# EAGLE board Qwiic_Quad_Relay-Panel (EAGLE 9.0.1), part 1 of 2
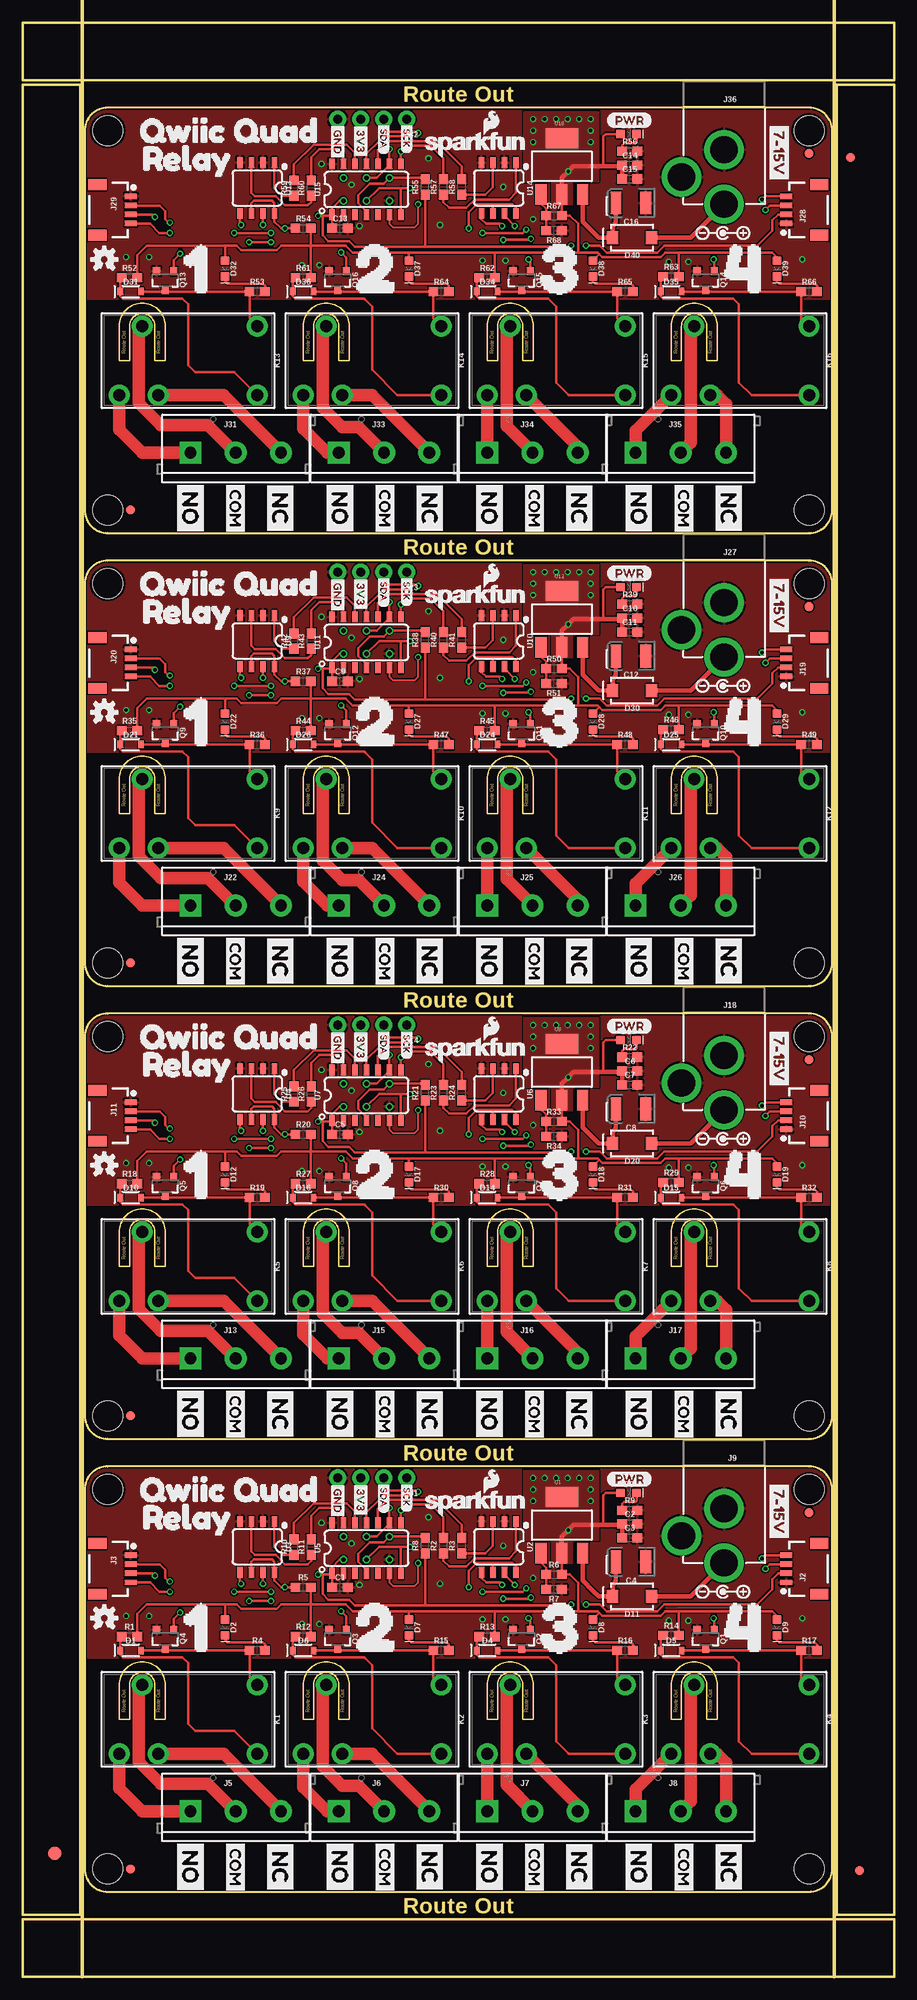
[diagram p0: board, top side]
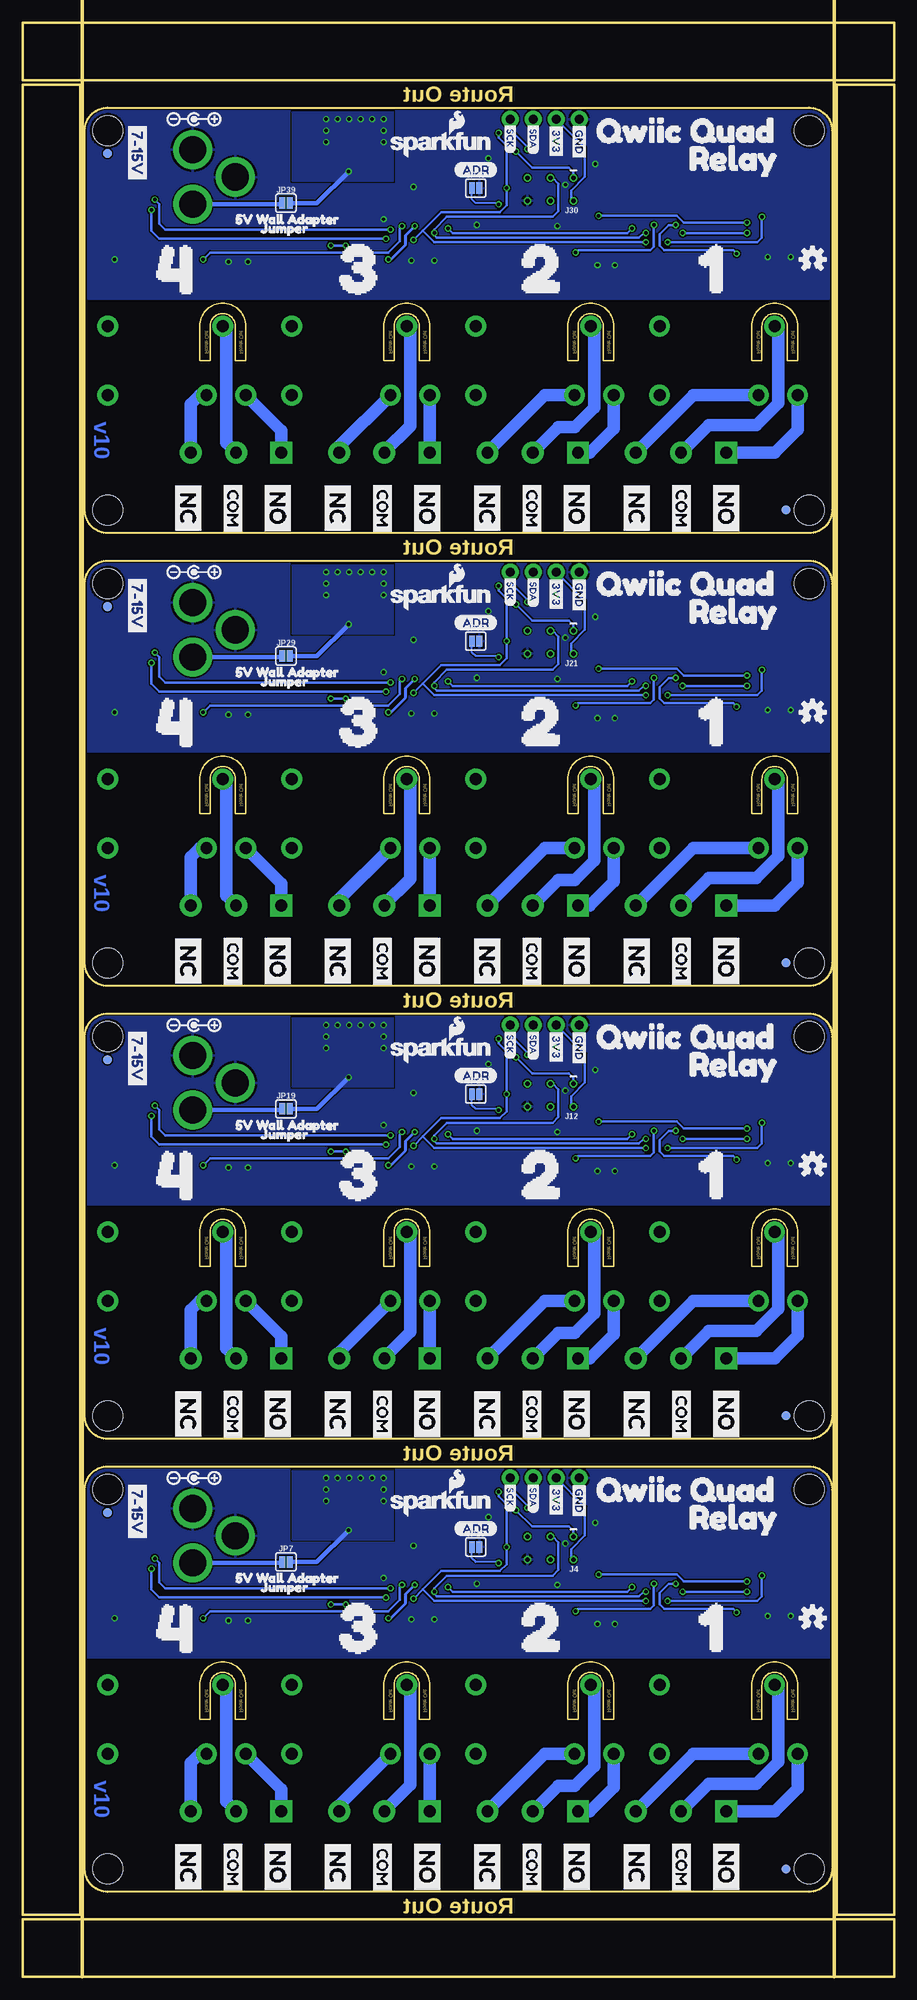
[diagram p1: board, bottom side, seen from below]

Size 96.27 x 215.9 mm. Coordinates in mm from the lower left corner, seen from the top.
Outline: 86.87,56.39 9.4,56.39 arc90 6.86,53.85 6.86,11.94 arc90 9.4,9.4 86.87,9.4 arc90 89.41,11.94 89.41,53.85 arc90 86.87,56.39
Outline: 86.87,106.43 9.4,106.43 arc90 6.86,103.89 6.86,61.98 arc90 9.4,59.44 86.87,59.44 arc90 89.41,61.98 89.41,103.89 arc90 86.87,106.43
Outline: 86.87,156.46 9.4,156.46 arc90 6.86,153.92 6.86,112.01 arc90 9.4,109.47 86.87,109.47 arc90 89.41,112.01 89.41,153.92 arc90 86.87,156.46
Outline: 86.87,206.5 9.4,206.5 arc90 6.86,203.96 6.86,162.05 arc90 9.4,159.51 86.87,159.51 arc90 89.41,162.05 89.41,203.96 arc90 86.87,206.5
Outline: 0,6.35 96.27,6.35 96.27,0 0,0 0,6.35
Outline: 89.92,209.04 96.27,209.04 96.27,6.86 89.92,6.86 89.92,209.04
Outline: 0,215.9 96.27,215.9 96.27,209.55 0,209.55 0,215.9
Outline: 0,209.04 6.35,209.04 6.35,6.86 0,6.86 0,209.04
Copper layers (1*16): Top 0.035mm / dielectric 1.5mm / Bottom 0.035mm
Design rules "SparkFun-2-layer-PCBWay-LIMIT": minimum track width 6mil, minimum drill 0.3mm, track to track 6mil, track to pad 6mil, pad to pad 6mil, via to via 6mil, smd to smd 6mil, copper to edge 6mil, drill to drill 6mil, minimum pad ring 6mil, minimum via ring 6mil, stop-mask expansion 4mil, vias tented up to drill 25mil, thermal gap 10mil
Milling: 162 lines

## Footprints (pad centres in the part's own frame; a part is rotated, then mirrored left to right if it is on the bottom)
0603 = smd 1.1 x 1: 1 -0.85,0; 2 0.85,0
EIA3528 = smd 1.2 x 2.5: A 1.65,0; C -1.65,0
SOD-323 = smd 0.63 x 0.83: A 1.15,0; C -1.15,0
LED-0603 = smd 1 x 1: A -0.877,0; C 0.877,0
SMA-DIODE = smd 1.27 x 1.47: A -2.15,0; C 2.15,0
FIDUCIAL-1X2 = smd 1 x 1: 1 0,0
FIDUCIAL-1.5X3 = smd 1.5 x 1.5: 1 0,0
1X04_NO_SILK = drill 1.016 pad 1.88: 1 0,0; 2 2.54,0; 3 5.08,0; 4 7.62,0
1X04_1MM_RA = smd 0.6 x 1.35: 1 -1.5,0; 2 -0.5,0; 3 0.5,0; 4 1.5,0 | smd 1.2 x 2: NC1 2.8,-3.675; NC2 -2.8,-3.675
2X3_TEST_POINTS = drill 0.508: 1 -2.54,-1.27; 2 -2.54,1.27; 3 0,-1.27; 4 0,1.27; 5 2.54,-1.27; 6 2.54,1.27
SCREWTERMINAL-5MM-3 = drill 1.3 pad 2.413 square: 1 0,0 | drill 1.3 pad 2.413: 2 5,0; 3 10,0
POWER_JACK_PTH = drill 2.997 pad 4.318: GND 0,7.7; GNDBREAK 4.7,10.7; PWR 0,13.7
STAND-OFF = hole 3.302: 0,0
SMT-JUMPER_2_NO_SILK = smd 0.635 x 1.27: 1 -0.406,0; 2 0.406,0
RELAY-JZC = drill 1.3 pad 2.286: 1 3.81,-8.89; 2 -3.81,2.032; 3 -3.81,6.35; 4 3.81,3.81; 5 -3.81,-8.89
SOT23-3 = smd 0.8 x 0.9: 1 -0.95,-1; 2 0.95,-1; 3 0,1.1
SOT223 = smd 1.219 x 2.235: 1 -2.311,-3.099; 2 0,-3.099; 3 2.311,-3.099 | smd 3.6 x 2.2: 4 0,3.099
SO08 = smd 0.6 x 1.2: 1 -1.905,-2.8; 2 -0.635,-2.8; 3 0.635,-2.8; 4 1.905,-2.8; 5 1.905,2.8; 6 0.635,2.8; 7 -0.635,2.8; 8 -1.905,2.8
SO14 = smd 0.6 x 1.2: 1 -3.175,-2.8; 2 -1.905,-2.8; 3 -0.635,-2.8; 4 0.635,-2.8; 5 1.905,-2.8; 6 3.175,-2.8; 7 4.445,-2.8; 8 4.445,2.8; 9 3.175,2.8; 10 1.905,2.8; 11 0.635,2.8; 12 -0.635,2.8; 13 -1.905,2.8; 14 -3.175,2.8

## Placement (x,y rotation side)
C1  0.1uF  [0603]  35.05,43.05 0 top
C2  10uF  [0603]  67.06,50.04 0 top
C3  0.1uF  [0603]  67.06,48.51 0 top
C4  10uF  [EIA3528]  67.18,45.85 180 top
C5  0.1uF  [0603]  35.05,93.09 0 top
C6  10uF  [0603]  67.06,100.08 0 top
C7  0.1uF  [0603]  67.06,98.55 0 top
C8  10uF  [EIA3528]  67.18,95.88 180 top
C9  0.1uF  [0603]  35.05,143.13 0 top
C10  10uF  [0603]  67.06,150.11 0 top
C11  0.1uF  [0603]  67.06,148.59 0 top
C12  10uF  [EIA3528]  67.18,145.92 180 top
C13  0.1uF  [0603]  35.05,193.17 0 top
C14  10uF  [0603]  67.06,200.15 0 top
C15  0.1uF  [0603]  67.06,198.63 0 top
C16  10uF  [EIA3528]  67.18,195.96 180 top
D1  1A/23V/620mV  [SOD-323]  11.94,36.07 0 top
D2  BLUE  [LED-0603]  22.35,38.61 270 top
D3  RED  [LED-0603]  66.93,53.47 0 top
D4  1A/23V/620mV  [SOD-323]  51.31,36.07 0 top
D5  1A/23V/620mV  [SOD-323]  71.63,36.07 0 top
D6  1A/23V/620mV  [SOD-323]  30.99,36.07 0 top
D7  BLUE  [LED-0603]  42.67,38.61 270 top
D8  BLUE  [LED-0603]  62.99,38.61 270 top
D9  BLUE  [LED-0603]  83.31,38.61 270 top
D10  1A/23V/620mV  [SOD-323]  11.94,86.11 0 top
D11  1A/40V/500mV  [SMA-DIODE]  67.31,42.04 180 top
D12  BLUE  [LED-0603]  22.35,88.65 270 top
D13  RED  [LED-0603]  66.93,103.5 0 top
D14  1A/23V/620mV  [SOD-323]  51.31,86.11 0 top
D15  1A/23V/620mV  [SOD-323]  71.63,86.11 0 top
D16  1A/23V/620mV  [SOD-323]  30.99,86.11 0 top
D17  BLUE  [LED-0603]  42.67,88.65 270 top
D18  BLUE  [LED-0603]  62.99,88.65 270 top
D19  BLUE  [LED-0603]  83.31,88.65 270 top
D20  1A/40V/500mV  [SMA-DIODE]  67.31,92.08 180 top
D21  1A/23V/620mV  [SOD-323]  11.94,136.14 0 top
D22  BLUE  [LED-0603]  22.35,138.68 270 top
D23  RED  [LED-0603]  66.93,153.54 0 top
D24  1A/23V/620mV  [SOD-323]  51.31,136.14 0 top
D25  1A/23V/620mV  [SOD-323]  71.63,136.14 0 top
D26  1A/23V/620mV  [SOD-323]  30.99,136.14 0 top
D27  BLUE  [LED-0603]  42.67,138.68 270 top
D28  BLUE  [LED-0603]  62.99,138.68 270 top
D29  BLUE  [LED-0603]  83.31,138.68 270 top
D30  1A/40V/500mV  [SMA-DIODE]  67.31,142.11 180 top
D31  1A/23V/620mV  [SOD-323]  11.94,186.18 0 top
D32  BLUE  [LED-0603]  22.35,188.72 270 top
D33  RED  [LED-0603]  66.93,203.58 0 top
D34  1A/23V/620mV  [SOD-323]  51.31,186.18 0 top
D35  1A/23V/620mV  [SOD-323]  71.63,186.18 0 top
D36  1A/23V/620mV  [SOD-323]  30.99,186.18 0 top
D37  BLUE  [LED-0603]  42.67,188.72 270 top
D38  BLUE  [LED-0603]  62.99,188.72 270 top
D39  BLUE  [LED-0603]  83.31,188.72 270 top
D40  1A/40V/500mV  [SMA-DIODE]  67.31,192.15 180 top
E$1  [FIDUCIAL-1X2]  92.46,11.75 0 top
E$2  [FIDUCIAL-1X2]  91.44,200.98 0 top
E$3  [FIDUCIAL-1.5X3]  3.56,13.65 0 top
J1  [1X04_NO_SILK]  42.42,55.12 180 top
J2  Qwiic Right Angle  [1X04_1MM_RA]  84.33,45.08 90 top
J3  Qwiic Right Angle  [1X04_1MM_RA]  11.94,45.08 270 top
J4  AVR_SPI_PROG_3X2TESTPOINTS  [2X3_TEST_POINTS]  37.97,47.37 180 bottom
J5  [SCREWTERMINAL-5MM-3]  18.54,18.29 0 top
J6  [SCREWTERMINAL-5MM-3]  34.92,18.29 0 top
J7  [SCREWTERMINAL-5MM-3]  51.31,18.29 0 top
J8  [SCREWTERMINAL-5MM-3]  67.69,18.29 0 top
J9  POWER_JACK  [POWER_JACK_PTH]  77.47,59.44 180 top
J10  Qwiic Right Angle  [1X04_1MM_RA]  84.33,95.12 90 top
J11  Qwiic Right Angle  [1X04_1MM_RA]  11.94,95.12 270 top
J12  AVR_SPI_PROG_3X2TESTPOINTS  [2X3_TEST_POINTS]  37.97,97.41 180 bottom
J13  [SCREWTERMINAL-5MM-3]  18.54,68.33 0 top
J14  [1X04_NO_SILK]  42.42,105.16 180 top
J15  [SCREWTERMINAL-5MM-3]  34.92,68.33 0 top
J16  [SCREWTERMINAL-5MM-3]  51.31,68.33 0 top
J17  [SCREWTERMINAL-5MM-3]  67.69,68.33 0 top
J18  POWER_JACK  [POWER_JACK_PTH]  77.47,109.47 180 top
J19  Qwiic Right Angle  [1X04_1MM_RA]  84.33,145.16 90 top
J20  Qwiic Right Angle  [1X04_1MM_RA]  11.94,145.16 270 top
J21  AVR_SPI_PROG_3X2TESTPOINTS  [2X3_TEST_POINTS]  37.97,147.45 180 bottom
J22  [SCREWTERMINAL-5MM-3]  18.54,118.36 0 top
J23  [1X04_NO_SILK]  42.42,155.19 180 top
J24  [SCREWTERMINAL-5MM-3]  34.92,118.36 0 top
J25  [SCREWTERMINAL-5MM-3]  51.31,118.36 0 top
J26  [SCREWTERMINAL-5MM-3]  67.69,118.36 0 top
J27  POWER_JACK  [POWER_JACK_PTH]  77.47,159.51 180 top
J28  Qwiic Right Angle  [1X04_1MM_RA]  84.33,195.2 90 top
J29  Qwiic Right Angle  [1X04_1MM_RA]  11.94,195.2 270 top
J30  AVR_SPI_PROG_3X2TESTPOINTS  [2X3_TEST_POINTS]  37.97,197.48 180 bottom
J31  [SCREWTERMINAL-5MM-3]  18.54,168.4 0 top
J32  [1X04_NO_SILK]  42.42,205.23 180 top
J33  [SCREWTERMINAL-5MM-3]  34.92,168.4 0 top
J34  [SCREWTERMINAL-5MM-3]  51.31,168.4 0 top
J35  [SCREWTERMINAL-5MM-3]  67.69,168.4 0 top
J36  POWER_JACK  [POWER_JACK_PTH]  77.47,209.55 180 top
JP1  STAND-OFF  [STAND-OFF]  9.4,11.94 0 top
JP2  FIDUCIAL1X2  [FIDUCIAL-1X2]  86.87,51.31 0 bottom
JP3  STAND-OFF  [STAND-OFF]  9.4,53.85 0 top
JP4  STAND-OFF  [STAND-OFF]  86.87,53.85 0 top
JP5  STAND-OFF  [STAND-OFF]  86.87,11.94 0 top
JP6  FIDUCIAL1X2  [FIDUCIAL-1X2]  11.94,11.94 0 bottom
JP7  JUMPER-SMT_2_NO_SILK  [SMT-JUMPER_2_NO_SILK]  67.18,45.85 0 bottom
JP8  FIDUCIAL1X2  [FIDUCIAL-1X2]  11.94,11.94 0 top
JP9  FIDUCIAL1X2  [FIDUCIAL-1X2]  86.87,51.31 0 top
JP10  JUMPER-SMT_2_NO_SILK  [SMT-JUMPER_2_NO_SILK]  46.23,47.5 0 bottom
JP11  STAND-OFF  [STAND-OFF]  9.4,103.89 0 top
JP12  STAND-OFF  [STAND-OFF]  86.87,103.89 0 top
JP13  FIDUCIAL1X2  [FIDUCIAL-1X2]  86.87,101.35 0 bottom
JP14  FIDUCIAL1X2  [FIDUCIAL-1X2]  11.94,61.98 0 bottom
JP15  STAND-OFF  [STAND-OFF]  9.4,61.98 0 top
JP16  STAND-OFF  [STAND-OFF]  86.87,61.98 0 top
JP17  FIDUCIAL1X2  [FIDUCIAL-1X2]  11.94,61.98 0 top
JP18  FIDUCIAL1X2  [FIDUCIAL-1X2]  86.87,101.35 0 top
JP19  JUMPER-SMT_2_NO_SILK  [SMT-JUMPER_2_NO_SILK]  67.18,95.88 0 bottom
JP20  JUMPER-SMT_2_NO_SILK  [SMT-JUMPER_2_NO_SILK]  46.23,97.54 0 bottom
JP21  STAND-OFF  [STAND-OFF]  9.4,153.92 0 top
JP22  STAND-OFF  [STAND-OFF]  86.87,153.92 0 top
JP23  FIDUCIAL1X2  [FIDUCIAL-1X2]  86.87,151.38 0 bottom
JP24  FIDUCIAL1X2  [FIDUCIAL-1X2]  11.94,112.01 0 bottom
JP25  STAND-OFF  [STAND-OFF]  9.4,112.01 0 top
JP26  STAND-OFF  [STAND-OFF]  86.87,112.01 0 top
JP27  FIDUCIAL1X2  [FIDUCIAL-1X2]  11.94,112.01 0 top
JP28  FIDUCIAL1X2  [FIDUCIAL-1X2]  86.87,151.38 0 top
JP29  JUMPER-SMT_2_NO_SILK  [SMT-JUMPER_2_NO_SILK]  67.18,145.92 0 bottom
JP30  JUMPER-SMT_2_NO_SILK  [SMT-JUMPER_2_NO_SILK]  46.23,147.57 0 bottom
JP31  STAND-OFF  [STAND-OFF]  9.4,203.96 0 top
JP32  STAND-OFF  [STAND-OFF]  86.87,203.96 0 top
JP33  FIDUCIAL1X2  [FIDUCIAL-1X2]  86.87,201.42 0 bottom
JP34  FIDUCIAL1X2  [FIDUCIAL-1X2]  11.94,162.05 0 bottom
JP35  STAND-OFF  [STAND-OFF]  9.4,162.05 0 top
JP36  STAND-OFF  [STAND-OFF]  86.87,162.05 0 top
JP37  FIDUCIAL1X2  [FIDUCIAL-1X2]  11.94,162.05 0 top
JP38  FIDUCIAL1X2  [FIDUCIAL-1X2]  86.87,201.42 0 top
JP39  JUMPER-SMT_2_NO_SILK  [SMT-JUMPER_2_NO_SILK]  67.18,195.96 0 bottom
JP40  JUMPER-SMT_2_NO_SILK  [SMT-JUMPER_2_NO_SILK]  46.23,197.61 0 bottom
K1  RELAY-SPDT-JZC-11F  [RELAY-JZC]  17.02,28.45 90 top
K2  RELAY-SPDT-JZC-11F  [RELAY-JZC]  37.34,28.45 90 top
K3  RELAY-SPDT-JZC-11F  [RELAY-JZC]  57.66,28.45 90 top
K4  RELAY-SPDT-JZC-11F  [RELAY-JZC]  77.98,28.45 90 top
K5  RELAY-SPDT-JZC-11F  [RELAY-JZC]  17.02,78.49 90 top
K6  RELAY-SPDT-JZC-11F  [RELAY-JZC]  37.34,78.49 90 top
K7  RELAY-SPDT-JZC-11F  [RELAY-JZC]  57.66,78.49 90 top
K8  RELAY-SPDT-JZC-11F  [RELAY-JZC]  77.98,78.49 90 top
K9  RELAY-SPDT-JZC-11F  [RELAY-JZC]  17.02,128.52 90 top
K10  RELAY-SPDT-JZC-11F  [RELAY-JZC]  37.34,128.52 90 top
K11  RELAY-SPDT-JZC-11F  [RELAY-JZC]  57.66,128.52 90 top
K12  RELAY-SPDT-JZC-11F  [RELAY-JZC]  77.98,128.52 90 top
K13  RELAY-SPDT-JZC-11F  [RELAY-JZC]  17.02,178.56 90 top
K14  RELAY-SPDT-JZC-11F  [RELAY-JZC]  37.34,178.56 90 top
K15  RELAY-SPDT-JZC-11F  [RELAY-JZC]  57.66,178.56 90 top
K16  RELAY-SPDT-JZC-11F  [RELAY-JZC]  77.98,178.56 90 top
LOGO1  OSHW-LOGOS  [OSHW-LOGO-S]  9.02,39.62 0 top
LOGO2  SFE_LOGO_NAME_FLAME.1_INCH  [SFE_LOGO_NAME_FLAME_.1]  50.04,52.32 0 top
LOGO3  SFE_LOGO_NAME_FLAME.1_INCH  [SFE_LOGO_NAME_FLAME_.1]  50.04,52.32 0 bottom
LOGO4  OSHW-LOGOS  [OSHW-LOGO-S]  9.02,89.66 0 top
LOGO5  SFE_LOGO_NAME_FLAME.1_INCH  [SFE_LOGO_NAME_FLAME_.1]  50.04,102.36 0 top
LOGO6  SFE_LOGO_NAME_FLAME.1_INCH  [SFE_LOGO_NAME_FLAME_.1]  50.04,102.36 0 bottom
LOGO7  OSHW-LOGOS  [OSHW-LOGO-S]  9.02,139.7 0 top
LOGO8  SFE_LOGO_NAME_FLAME.1_INCH  [SFE_LOGO_NAME_FLAME_.1]  50.04,152.4 0 top
LOGO9  SFE_LOGO_NAME_FLAME.1_INCH  [SFE_LOGO_NAME_FLAME_.1]  50.04,152.4 0 bottom
LOGO10  OSHW-LOGOS  [OSHW-LOGO-S]  9.02,189.74 0 top
LOGO11  SFE_LOGO_NAME_FLAME.1_INCH  [SFE_LOGO_NAME_FLAME_.1]  50.04,202.44 0 top
LOGO12  SFE_LOGO_NAME_FLAME.1_INCH  [SFE_LOGO_NAME_FLAME_.1]  50.04,202.44 0 bottom
Q1  600mA/40V  [SOT23-3]  75.44,37.34 180 top
Q2  600mA/40V  [SOT23-3]  55.12,37.34 180 top
Q3  600mA/40V  [SOT23-3]  34.8,37.34 180 top
Q4  600mA/40V  [SOT23-3]  15.75,37.34 180 top
Q5  600mA/40V  [SOT23-3]  15.75,87.38 180 top
Q6  600mA/40V  [SOT23-3]  75.44,87.38 180 top
Q7  600mA/40V  [SOT23-3]  55.12,87.38 180 top
Q8  600mA/40V  [SOT23-3]  34.8,87.38 180 top
Q9  600mA/40V  [SOT23-3]  15.75,137.41 180 top
Q10  600mA/40V  [SOT23-3]  75.44,137.41 180 top
Q11  600mA/40V  [SOT23-3]  55.12,137.41 180 top
Q12  600mA/40V  [SOT23-3]  34.8,137.41 180 top
Q13  600mA/40V  [SOT23-3]  15.75,187.45 180 top
Q14  600mA/40V  [SOT23-3]  75.44,187.45 180 top
Q15  600mA/40V  [SOT23-3]  55.12,187.45 180 top
Q16  600mA/40V  [SOT23-3]  34.8,187.45 180 top
R1  33  [0603]  11.81,37.59 0 top
R2  100  [0603]  46.48,47.62 90 top
R3  100  [0603]  48.51,47.62 90 top
R4  1k  [0603]  25.91,36.07 0 top
R5  330  [0603]  30.99,43.05 0 top
R6  240  [0603]  58.67,44.45 0 top
R7  715  [0603]  58.67,42.8 180 top
R8  10k  [0603]  44.45,47.62 90 top
R9  1k  [0603]  67.06,51.56 0 top
R10  100  [0603]  29.97,47.5 90 top
R11  100  [0603]  31.88,47.5 90 top
R12  33  [0603]  30.99,37.59 0 top
R13  33  [0603]  51.31,37.59 0 top
R14  33  [0603]  71.63,37.72 0 top
R15  1k  [0603]  46.23,36.07 0 top
R16  1k  [0603]  66.55,36.07 0 top
R17  1k  [0603]  86.87,36.07 0 top
R18  33  [0603]  11.81,87.63 0 top
R19  1k  [0603]  25.91,86.11 0 top
R20  330  [0603]  30.99,93.09 0 top
R21  10k  [0603]  44.45,97.66 90 top
R22  1k  [0603]  67.06,101.6 0 top
R23  100  [0603]  46.48,97.66 90 top
R24  100  [0603]  48.51,97.66 90 top
R25  100  [0603]  29.97,97.54 90 top
R26  100  [0603]  31.88,97.54 90 top
R27  33  [0603]  30.99,87.63 0 top
R28  33  [0603]  51.31,87.63 0 top
R29  33  [0603]  71.63,87.76 0 top
R30  1k  [0603]  46.23,86.11 0 top
R31  1k  [0603]  66.55,86.11 0 top
R32  1k  [0603]  86.87,86.11 0 top
R33  240  [0603]  58.67,94.49 0 top
R34  715  [0603]  58.67,92.84 180 top
R35  33  [0603]  11.81,137.67 0 top
R36  1k  [0603]  25.91,136.14 0 top
R37  330  [0603]  30.99,143.13 0 top
R38  10k  [0603]  44.45,147.7 90 top
R39  1k  [0603]  67.06,151.64 0 top
R40  100  [0603]  46.48,147.7 90 top
R41  100  [0603]  48.51,147.7 90 top
R42  100  [0603]  29.97,147.57 90 top
R43  100  [0603]  31.88,147.57 90 top
R44  33  [0603]  30.99,137.67 0 top
R45  33  [0603]  51.31,137.67 0 top
R46  33  [0603]  71.63,137.79 0 top
R47  1k  [0603]  46.23,136.14 0 top
R48  1k  [0603]  66.55,136.14 0 top
R49  1k  [0603]  86.87,136.14 0 top
R50  240  [0603]  58.67,144.53 0 top
R51  715  [0603]  58.67,142.88 180 top
R52  33  [0603]  11.81,187.71 0 top
R53  1k  [0603]  25.91,186.18 0 top
R54  330  [0603]  30.99,193.17 0 top
R55  10k  [0603]  44.45,197.74 90 top
R56  1k  [0603]  67.06,201.68 0 top
R57  100  [0603]  46.48,197.74 90 top
R58  100  [0603]  48.51,197.74 90 top
R59  100  [0603]  29.97,197.61 90 top
R60  100  [0603]  31.88,197.61 90 top
R61  33  [0603]  30.99,187.71 0 top
R62  33  [0603]  51.31,187.71 0 top
R63  33  [0603]  71.63,187.83 0 top
R64  1k  [0603]  46.23,186.18 0 top
R65  1k  [0603]  66.55,186.18 0 top
R66  1k  [0603]  86.87,186.18 0 top
R67  240  [0603]  58.67,194.56 0 top
R68  715  [0603]  58.67,192.91 180 top
U1  [SOT223]  59.56,49.91 0 top
U2  DUAL-OPTOISOLATOR_SOIC8  [SO08]  52.58,47.5 180 top
U3  DUAL-OPTOISOLATOR_SOIC8  [SO08]  25.91,47.5 180 top
U4  DUAL-OPTOISOLATOR_SOIC8  [SO08]  25.91,97.54 180 top
U5  ATTINY84-ARDUINO  [SO14]  37.34,47.37 0 top
U6  DUAL-OPTOISOLATOR_SOIC8  [SO08]  52.58,97.54 180 top
U7  ATTINY84-ARDUINO  [SO14]  37.34,97.41 0 top
U8  [SOT223]  59.56,99.95 0 top
U9  DUAL-OPTOISOLATOR_SOIC8  [SO08]  25.91,147.57 180 top
U10  DUAL-OPTOISOLATOR_SOIC8  [SO08]  52.58,147.57 180 top
U11  ATTINY84-ARDUINO  [SO14]  37.34,147.45 0 top
U12  [SOT223]  59.56,149.99 0 top
U13  DUAL-OPTOISOLATOR_SOIC8  [SO08]  25.91,197.61 180 top
U14  DUAL-OPTOISOLATOR_SOIC8  [SO08]  52.58,197.61 180 top
U15  ATTINY84-ARDUINO  [SO14]  37.34,197.48 0 top
U16  [SOT223]  59.56,200.03 0 top
U$1  [PWR-()-04]  64.52,54.99 0 top
U$2  [20]  32.26,38.61 0 top
U$3  [10]  13.21,38.61 0 top
U$4  [30]  52.58,38.61 0 top
U$5  [40]  72.9,38.61 0 top
U$6  [QWIIC_QUAD_0]  10.67,53.85 0 top
U$7  [RELAY0]  11.05,50.8 0 top
U$8  [SCK-[)-03]  42.42,54.74 270 top
U$9  [GND-03]  34.8,54.74 270 top
U$10  [3V3-03]  37.34,54.74 270 top
U$11  [SDA0]  39.88,54.74 270 top
U$12  [3V3-03]  37.34,54.74 270 bottom
U$13  [OSHW-LOGO-S]  9.02,39.62 0 bottom
U$14  [PWR-()-04]  64.52,105.03 0 top
U$15  [NO0]  18.54,15.62 270 top
U$16  [COM0]  23.5,15.37 270 top
U$17  [NC0]  28.45,15.49 270 top
U$18  [NO0]  35.05,15.62 270 top
U$19  [COM0]  40,15.37 270 top
U$20  [NC0]  44.96,15.49 270 top
U$21  [NO0]  51.56,15.62 270 top
U$22  [COM0]  56.51,15.37 270 top
U$23  [NC0]  61.47,15.49 270 top
U$24  [NO0]  68.07,15.62 270 top
U$25  [COM0]  73.03,15.37 270 top
U$26  [NC0]  77.98,15.49 270 top
U$27  [NO0]  51.56,15.62 270 bottom
U$28  [COM0]  73.03,15.37 270 bottom
U$29  [NC0]  77.98,15.49 270 bottom
U$30  [NO0]  68.07,15.62 270 bottom
U$31  [COM0]  56.51,15.37 270 bottom
U$32  [NC0]  61.47,15.49 270 bottom
U$33  [NO0]  35.05,15.62 270 bottom
U$34  [COM0]  40,15.37 270 bottom
U$35  [NC0]  44.96,15.49 270 bottom
U$36  [NO0]  18.54,15.62 270 bottom
U$37  [COM0]  23.5,15.37 270 bottom
U$38  [NC0]  28.45,15.49 270 bottom
U$39  [10]  26.16,38.61 0 bottom
U$40  [20]  45.72,38.61 0 bottom
U$41  [30]  65.91,38.61 0 bottom
U$42  [40]  86.11,38.48 0 bottom
U$43  [QWIIC_QUAD_0]  35.18,53.85 0 bottom
U$44  [RELAY0]  24.89,50.8 0 bottom
U$45  [GND-03]  34.8,54.74 270 bottom
U$46  [20]  32.26,88.65 0 top
U$47  [SDA0]  39.88,54.74 270 bottom
U$48  [SCK-[)-03]  42.42,54.74 270 bottom
U$49  [7#15V0]  83.57,54.99 270 top
U$50  [5V_WALL_ADAPTER0]  73.66,44.07 0 bottom
U$51  [POLARITY_MARKING_CENTER_POSITIVE#JPG]  77.34,42.55 0 top
U$52  [JUMPER0]  70.87,43.05 0 bottom
U$53  [7#15V0]  83.57,54.99 270 bottom
U$54  [POLARITY_MARKING_CENTER_POSITIVE#JPG]  77.34,55.12 0 bottom
U$55  [10]  13.21,88.65 0 top
U$56  [ADR-()-04]  48.64,49.53 0 bottom
U$57  [30]  52.58,88.65 0 top
U$58  [40]  72.9,88.65 0 top
U$59  [QWIIC_QUAD_0]  10.67,103.89 0 top
U$60  [RELAY0]  11.05,100.84 0 top
U$61  [NO0]  18.54,65.66 270 top
U$62  [COM0]  23.5,65.41 270 top
U$63  [NC0]  28.45,65.53 270 top
U$64  [NO0]  35.05,65.66 270 top
U$65  [COM0]  40,65.41 270 top
U$66  [NC0]  44.96,65.53 270 top
U$67  [NO0]  51.56,65.66 270 top
U$68  [COM0]  56.51,65.41 270 top
U$69  [NC0]  61.47,65.53 270 top
U$70  [NO0]  68.07,65.66 270 top
U$71  [COM0]  73.03,65.41 270 top
U$72  [NC0]  77.98,65.53 270 top
U$73  [NO0]  51.56,65.66 270 bottom
U$74  [COM0]  73.03,65.41 270 bottom
U$75  [NC0]  77.98,65.53 270 bottom
U$76  [NO0]  68.07,65.66 270 bottom
U$77  [COM0]  56.51,65.41 270 bottom
U$78  [NC0]  61.47,65.53 270 bottom
U$79  [NO0]  35.05,65.66 270 bottom
U$80  [COM0]  40,65.41 270 bottom
U$81  [NC0]  44.96,65.53 270 bottom
U$82  [NO0]  18.54,65.66 270 bottom
U$83  [COM0]  23.5,65.41 270 bottom
U$84  [NC0]  28.45,65.53 270 bottom
U$85  [10]  26.16,88.65 0 bottom
U$86  [20]  45.72,88.65 0 bottom
U$87  [30]  65.91,88.65 0 bottom
U$88  [40]  86.11,88.52 0 bottom
U$89  [QWIIC_QUAD_0]  35.18,103.89 0 bottom
U$90  [RELAY0]  24.89,100.84 0 bottom
U$91  [OSHW-LOGO-S]  9.02,89.66 0 bottom
U$92  [7#15V0]  83.57,105.03 270 top
U$93  [SCK-[)-03]  42.42,104.77 270 top
U$94  [GND-03]  34.8,104.77 270 top
U$95  [SDA0]  39.88,104.77 270 top
U$96  [GND-03]  34.8,104.77 270 bottom
U$97  [SDA0]  39.88,104.77 270 bottom
U$98  [SCK-[)-03]  42.42,104.77 270 bottom
U$99  [POLARITY_MARKING_CENTER_POSITIVE#JPG]  77.34,92.58 0 top
U$100  [7#15V0]  83.57,105.03 270 bottom
U$101  [POLARITY_MARKING_CENTER_POSITIVE#JPG]  77.34,105.16 0 bottom
U$102  [5V_WALL_ADAPTER0]  73.66,94.11 0 bottom
U$103  [JUMPER0]  70.87,93.09 0 bottom
U$104  [ADR-()-04]  48.64,99.57 0 bottom
U$105  [3V3-03]  37.34,104.77 270 top
U$106  [3V3-03]  37.34,104.77 270 bottom
U$107  [PWR-()-04]  64.52,155.07 0 top
U$108  [20]  32.26,138.68 0 top
U$109  [10]  13.21,138.68 0 top
U$110  [30]  52.58,138.68 0 top
U$111  [40]  72.9,138.68 0 top
U$112  [QWIIC_QUAD_0]  10.67,153.92 0 top
U$113  [RELAY0]  11.05,150.88 0 top
U$114  [NO0]  18.54,115.7 270 top
U$115  [COM0]  23.5,115.44 270 top
U$116  [NC0]  28.45,115.57 270 top
U$117  [NO0]  35.05,115.7 270 top
U$118  [COM0]  40,115.44 270 top
U$119  [NC0]  44.96,115.57 270 top
U$120  [NO0]  51.56,115.7 270 top
U$121  [COM0]  56.51,115.44 270 top
U$122  [NC0]  61.47,115.57 270 top
U$123  [NO0]  68.07,115.7 270 top
U$124  [COM0]  73.03,115.44 270 top
U$125  [NC0]  77.98,115.57 270 top
U$126  [NO0]  51.56,115.7 270 bottom
U$127  [COM0]  73.03,115.44 270 bottom
U$128  [NC0]  77.98,115.57 270 bottom
U$129  [NO0]  68.07,115.7 270 bottom
U$130  [COM0]  56.51,115.44 270 bottom
U$131  [NC0]  61.47,115.57 270 bottom
U$132  [NO0]  35.05,115.7 270 bottom
U$133  [COM0]  40,115.44 270 bottom
U$134  [NC0]  44.96,115.57 270 bottom
U$135  [NO0]  18.54,115.7 270 bottom
U$136  [COM0]  23.5,115.44 270 bottom
U$137  [NC0]  28.45,115.57 270 bottom
U$138  [10]  26.16,138.68 0 bottom
U$139  [20]  45.72,138.68 0 bottom
U$140  [30]  65.91,138.68 0 bottom
U$141  [40]  86.11,138.56 0 bottom
U$142  [QWIIC_QUAD_0]  35.18,153.92 0 bottom
U$143  [RELAY0]  24.89,150.88 0 bottom
U$144  [OSHW-LOGO-S]  9.02,139.7 0 bottom
U$145  [7#15V0]  83.57,155.07 270 top
U$146  [SCK-[)-03]  42.42,154.81 270 top
U$147  [GND-03]  34.8,154.81 270 top
U$148  [SDA0]  39.88,154.81 270 top
U$149  [GND-03]  34.8,154.81 270 bottom
U$150  [SDA0]  39.88,154.81 270 bottom
U$151  [SCK-[)-03]  42.42,154.81 270 bottom
U$152  [POLARITY_MARKING_CENTER_POSITIVE#JPG]  77.34,142.62 0 top
U$153  [7#15V0]  83.57,155.07 270 bottom
U$154  [POLARITY_MARKING_CENTER_POSITIVE#JPG]  77.34,155.19 0 bottom
U$155  [5V_WALL_ADAPTER0]  73.66,144.15 0 bottom
U$156  [JUMPER0]  70.87,143.13 0 bottom
U$157  [ADR-()-04]  48.64,149.61 0 bottom
U$158  [3V3-03]  37.34,154.81 270 top
U$159  [3V3-03]  37.34,154.81 270 bottom
U$160  [PWR-()-04]  64.52,205.1 0 top
U$161  [20]  32.26,188.72 0 top
U$162  [10]  13.21,188.72 0 top
U$163  [30]  52.58,188.72 0 top
U$164  [40]  72.9,188.72 0 top
U$165  [QWIIC_QUAD_0]  10.67,203.96 0 top
U$166  [RELAY0]  11.05,200.91 0 top
U$167  [NO0]  18.54,165.73 270 top
U$168  [COM0]  23.5,165.48 270 top
U$169  [NC0]  28.45,165.61 270 top
U$170  [NO0]  35.05,165.73 270 top
U$171  [COM0]  40,165.48 270 top
U$172  [NC0]  44.96,165.61 270 top
U$173  [NO0]  51.56,165.73 270 top
U$174  [COM0]  56.51,165.48 270 top
U$175  [NC0]  61.47,165.61 270 top
U$176  [NO0]  68.07,165.73 270 top
U$177  [COM0]  73.03,165.48 270 top
U$178  [NC0]  77.98,165.61 270 top
U$179  [NO0]  51.56,165.73 270 bottom
U$180  [COM0]  73.03,165.48 270 bottom
U$181  [NC0]  77.98,165.61 270 bottom
U$182  [NO0]  68.07,165.73 270 bottom
U$183  [COM0]  56.51,165.48 270 bottom
U$184  [NC0]  61.47,165.61 270 bottom
U$185  [NO0]  35.05,165.73 270 bottom
U$186  [COM0]  40,165.48 270 bottom
U$187  [NC0]  44.96,165.61 270 bottom
U$188  [NO0]  18.54,165.73 270 bottom
U$189  [COM0]  23.5,165.48 270 bottom
U$190  [NC0]  28.45,165.61 270 bottom
U$191  [10]  26.16,188.72 0 bottom
U$192  [20]  45.72,188.72 0 bottom
U$193  [30]  65.91,188.72 0 bottom
U$194  [40]  86.11,188.59 0 bottom
U$195  [QWIIC_QUAD_0]  35.18,203.96 0 bottom
U$196  [RELAY0]  24.89,200.91 0 bottom
U$197  [OSHW-LOGO-S]  9.02,189.74 0 bottom
U$198  [7#15V0]  83.57,205.1 270 top
U$199  [SCK-[)-03]  42.42,204.85 270 top
U$200  [GND-03]  34.8,204.85 270 top
U$201  [SDA0]  39.88,204.85 270 top
U$202  [GND-03]  34.8,204.85 270 bottom
U$203  [SDA0]  39.88,204.85 270 bottom
U$204  [SCK-[)-03]  42.42,204.85 270 bottom
U$205  [POLARITY_MARKING_CENTER_POSITIVE#JPG]  77.34,192.66 0 top
U$206  [7#15V0]  83.57,205.1 270 bottom
U$207  [POLARITY_MARKING_CENTER_POSITIVE#JPG]  77.34,205.23 0 bottom
U$208  [5V_WALL_ADAPTER0]  73.66,194.18 0 bottom
U$209  [JUMPER0]  70.87,193.17 0 bottom
U$210  [ADR-()-04]  48.64,199.64 0 bottom
U$211  [3V3-03]  37.34,204.85 270 top
U$212  [3V3-03]  37.34,204.85 270 bottom

## Library data of the parts
C1 C3 C5 C7 C9 C11 C13 C15 = SparkFun-Capacitors; PROD_ID: CAP-00810
C2 C6 C10 C14 = SparkFun-Capacitors; PROD_ID: CAP-11015
C4 C8 C12 C16 = SparkFun-Capacitors; PROD_ID: CAP-08063
D1 D4-D6 D10 D14-D16 D21 D24-D26 D31 D34-D36 = SparkFun-DiscreteSemi; PROD_ID: DIO-11623
D2 D7-D9 D12 D17-D19 D22 D27-D29 D32 D37-D39 = SparkFun-LED; PROD_ID: DIO-08575
D3 D13 D23 D33 = SparkFun-LED; PROD_ID: DIO-00819
D11 D20 D30 D40 = SparkFun-DiscreteSemi; PROD_ID: DIO-08053
E$1 E$2 JP2 JP6 JP8 JP9 JP13 JP14 JP17 JP18 JP23 JP24 JP27 JP28 JP33 JP34 JP37 JP38 LOGO1-LOGO12 U$13 U$91 U$144 U$197 = SparkFun-Aesthetics
E$3 = SparkFun-Retired
J1 J14 J23 J32 = SparkFun-Connectors; PROD_ID: CONN-09696
J2 J3 J10 J11 J19 J20 J28 J29 = SparkFun-Connectors; PROD_ID: CONN-13694
J4 J12 J21 J30 = SparkFun-Connectors
J5-J8 J13 J15-J17 J22 J24-J26 J31 J33-J35 = SparkFun-Connectors; PROD_ID: CONN-10134; SF_SKU: PRT-08433
J9 J18 J27 J36 = SparkFun-Connectors; PROD_ID: CONN-08197
JP1 JP3-JP5 JP11 JP12 JP15 JP16 JP21 JP22 JP25 JP26 JP31 JP32 JP35 JP36 = SparkFun
JP7 JP10 JP19 JP20 JP29 JP30 JP39 JP40 = SparkFun-Jumpers
K1-K16 = SparkFun-Electromechanical; PROD_ID: COMP-09533; SF_SKU: COM-00100
Q1-Q16 = SparkFun-DiscreteSemi; PROD_ID: TRANS-08049
R1 R12-R14 R18 R27-R29 R35 R44-R46 R52 R61-R63 = SparkFun-Resistors; PROD_ID: RES-08270
R2 R3 R10 R11 R23-R26 R40-R43 R57-R60 = SparkFun-Resistors; PROD_ID: RES-07863
R4 R9 R15-R17 R19 R22 R30-R32 R36 R39 R47-R49 R53 R56 R64-R66 = SparkFun-Resistors; PROD_ID: RES-07856
R5 R20 R37 R54 = SparkFun-Resistors; PROD_ID: RES-00818
R6 R33 R50 R67 = SparkFun-Resistors; PROD_ID: RES-07849
R7 R34 R51 R68 = SparkFun-Resistors; PROD_ID: RES-07850
R8 R21 R38 R55 = SparkFun-Resistors; PROD_ID: RES-00824
U1 U8 U12 U16 = SparkFun-IC-Power; PROD_ID: VREG-08170
U2-U4 U6 U9 U10 U13 U14 = SparkFun-DiscreteSemi; PROD_ID: IC-09076
U5 U7 U11 U15 = SparkFun-IC-Microcontroller; PROD_ID: IC-11285
U$1 U$8-U$10 U$12 U$14 U$45 U$48 U$56 U$93 U$94 U$96 U$98 U$104-U$107 U$146 U$147 U$149 U$151 U$157-U$160 U$199 U$200 U$202 U$204 U$210-U$212 = Labels
U$2 U$40 U$46 U$86 U$108 U$139 U$161 U$192 = 2
U$3 U$39 U$55 U$85 U$109 U$138 U$162 U$191 = 1
U$4 U$41 U$57 U$87 U$110 U$140 U$163 U$193 = 3
U$5 U$42 U$58 U$88 U$111 U$141 U$164 U$194 = 4
U$6 U$43 U$59 U$89 U$112 U$142 U$165 U$195 = Quad
U$7 U$44 U$60 U$90 U$113 U$143 U$166 U$196 = relay
U$11 U$47 U$95 U$97 U$148 U$150 U$201 U$203 = SDA
U$15 U$18 U$21 U$24 U$27 U$30 U$33 U$36 U$61 U$64 U$67 U$70 U$73 U$76 U$79 U$82 U$114 U$117 U$120 U$123 U$126 U$129 U$132 U$135 U$167 U$170 U$173 U$176 U$179 U$182 U$185 U$188 = NO
U$16 U$19 U$22 U$25 U$28 U$31 U$34 U$37 U$62 U$65 U$68 U$71 U$74 U$77 U$80 U$83 U$115 U$118 U$121 U$124 U$127 U$130 U$133 U$136 U$168 U$171 U$174 U$177 U$180 U$183 U$186 U$189 = COM
U$17 U$20 U$23 U$26 U$29 U$32 U$35 U$38 U$63 U$66 U$69 U$72 U$75 U$78 U$81 U$84 U$116 U$119 U$122 U$125 U$128 U$131 U$134 U$137 U$169 U$172 U$175 U$178 U$181 U$184 U$187 U$190 = NC
U$49 U$53 U$92 U$100 U$145 U$153 U$198 U$206 = 7-15V
U$50 U$102 U$155 U$208 = 5V Wall Adapter
U$51 U$54 U$99 U$101 U$152 U$154 U$205 U$207 = Polarity_marking_center_positive#jpg
U$52 U$103 U$156 U$209 = jumper

## Nets
3.3V: C1.1 J1.3 J2.2 J3.2 J4.2 R8.1 U5.1
3.3V1: C5.1 J10.2 J11.2 J12.2 J14.3 R21.1 U7.1
3.3V2: C9.1 J19.2 J20.2 J21.2 J23.3 R38.1 U11.1
3.3V3: C13.1 J28.2 J29.2 J30.2 J32.3 R55.1 U15.1
5V: C2.1 C3.1 D2.A D3.A D7.A D8.A D9.A JP7.2 R1.2 R5.2 R6.2 R12.2 R13.2 R14.2 U1.2 U1.4
5V1: C6.1 C7.1 D12.A D13.A D17.A D18.A D19.A JP19.2 R18.2 R20.2 R27.2 R28.2 R29.2 R33.2 U8.2 U8.4
5V2: C10.1 C11.1 D22.A D23.A D27.A D28.A D29.A JP29.2 R35.2 R37.2 R44.2 R45.2 R46.2 R50.2 U12.2 U12.4
5V3: C14.1 C15.1 D32.A D33.A D37.A D38.A D39.A JP39.2 R52.2 R54.2 R61.2 R62.2 R63.2 R67.2 U16.2 U16.4
!RESET: J4.5 R8.2 U5.4
!RESET1: J12.5 R21.2 U7.4
!RESET2: J21.5 R38.2 U11.4
!RESET3: J30.5 R55.2 U15.4
ADDR_JUMP: JP10.1 U5.6
ADDR_JUMP1: JP20.1 U7.6
ADDR_JUMP2: JP30.1 U11.6
ADDR_JUMP3: JP40.1 U15.6
COM1: J5.2 K1.4
COM2: J6.2 K2.4
COM3: J7.2 K3.4
COM4: J8.2 K4.4
COM5: J13.2 K5.4
COM6: J15.2 K6.4
COM7: J16.2 K7.4
COM8: J17.2 K8.4
COM9: J22.2 K9.4
COM10: J24.2 K10.4
COM11: J25.2 K11.4
COM12: J26.2 K12.4
COM13: J31.2 K13.4
COM14: J33.2 K14.4
COM15: J34.2 K15.4
COM16: J35.2 K16.4
GND: C1.2 C2.2 C3.2 C4.C J1.4 J2.1 J3.1 J4.6 J9.GND J9.GNDBREAK JP10.2 Q1.2 Q2.2 Q3.2 Q4.2 R7.1 R9.2 U2.2 U2.4 U3.2 U3.4 U5.14
GND1: C5.2 C6.2 C7.2 C8.C J10.1 J11.1 J12.6 J14.4 J18.GND J18.GNDBREAK JP20.2 Q5.2 Q6.2 Q7.2 Q8.2 R22.2 R34.1 U4.2 U4.4 U6.2 U6.4 U7.14
GND2: C9.2 C10.2 C11.2 C12.C J19.1 J20.1 J21.6 J23.4 J27.GND J27.GNDBREAK JP30.2 Q9.2 Q10.2 Q11.2 Q12.2 R39.2 R51.1 U9.2 U9.4 U10.2 U10.4 U11.14
GND3: C13.2 C14.2 C15.2 C16.C J28.1 J29.1 J30.6 J32.4 J36.GND J36.GNDBREAK JP40.2 Q13.2 Q14.2 Q15.2 Q16.2 R56.2 R68.1 U13.2 U13.4 U14.2 U14.4 U15.14
MISO: J4.1 U5.8
MISO1: J12.1 U7.8
MISO2: J21.1 U11.8
MISO3: J30.1 U15.8
N$1: D6.C K2.5 R12.1
N$2: D1.A K1.1 Q4.3 R4.1
N$3: R11.1 U3.3
N$4: C4.A D11.C U1.3
N$5: R10.1 U3.1
N$6: R5.1 U2.6 U2.8 U3.6 U3.8
N$7: D1.C K1.5 R1.1
N$8: D2.C R4.2
N$9: R2.1 U2.1
N$10: D10.A K5.1 Q5.3 R19.1
N$11: R3.1 U2.3
N$12: D6.A K2.1 Q3.3 R15.1
N$13: D3.C R9.1
N$14: D4.C K3.5 R13.1
N$15: D4.A K3.1 Q2.3 R16.1
N$16: D5.C K4.5 R14.1
N$17: D5.A K4.1 Q1.3 R17.1
N$18: D10.C K5.5 R18.1
N$19: R6.1 R7.2 U1.1
N$20: D9.C R17.2
N$21: D8.C R16.2
N$22: D7.C R15.2
N$23: D12.C R19.2
N$24: D13.C R22.1
N$25: R26.1 U4.3
N$26: R25.1 U4.1
N$27: R20.1 U4.6 U4.8 U6.6 U6.8
N$28: R23.1 U6.1
N$29: R24.1 U6.3
N$30: D16.C K6.5 R27.1
N$31: D16.A K6.1 Q8.3 R30.1
N$32: D14.C K7.5 R28.1
N$33: D14.A K7.1 Q7.3 R31.1
N$34: D15.C K8.5 R29.1
N$35: D15.A K8.1 Q6.3 R32.1
N$36: D19.C R32.2
N$37: D18.C R31.2
N$38: D17.C R30.2
N$39: R33.1 R34.2 U8.1
N$40: C8.A D20.C U8.3
N$41: D21.A K9.1 Q9.3 R36.1
N$42: D21.C K9.5 R35.1
N$43: D22.C R36.2
N$44: D23.C R39.1
N$45: R43.1 U9.3
N$46: R42.1 U9.1
N$47: R37.1 U9.6 U9.8 U10.6 U10.8
N$48: R40.1 U10.1
N$49: R41.1 U10.3
N$50: D26.C K10.5 R44.1
N$51: D26.A K10.1 Q12.3 R47.1
N$52: D24.C K11.5 R45.1
N$53: D24.A K11.1 Q11.3 R48.1
N$54: D25.C K12.5 R46.1
N$55: D25.A K12.1 Q10.3 R49.1
N$56: D29.C R49.2
N$57: D28.C R48.2
N$58: D27.C R47.2
N$59: R50.1 R51.2 U12.1
N$60: C12.A D30.C U12.3
N$61: D31.A K13.1 Q13.3 R53.1
N$62: D31.C K13.5 R52.1
N$63: D32.C R53.2
N$64: D33.C R56.1
N$65: R60.1 U13.3
N$66: R59.1 U13.1
N$67: R54.1 U13.6 U13.8 U14.6 U14.8
N$68: R57.1 U14.1
N$69: R58.1 U14.3
N$70: D36.C K14.5 R61.1
N$71: D36.A K14.1 Q16.3 R64.1
N$72: D34.C K15.5 R62.1
N$73: D34.A K15.1 Q15.3 R65.1
N$74: D35.C K16.5 R63.1
N$75: D35.A K16.1 Q14.3 R66.1
N$76: D39.C R66.2
N$77: D38.C R65.2
N$78: D37.C R64.2
N$79: R67.1 R68.2 U16.1
N$80: C16.A D40.C U16.3
NC1: J5.3 K1.2
NC2: J6.3 K2.2
NC3: J7.3 K3.2
NC4: J8.3 K4.2
NC5: J13.3 K5.2
NC6: J15.3 K6.2
NC7: J16.3 K7.2
NC8: J17.3 K8.2
NC9: J22.3 K9.2
NC10: J24.3 K10.2
NC11: J25.3 K11.2
NC12: J26.3 K12.2
NC13: J31.3 K13.2
NC14: J33.3 K14.2
NC15: J34.3 K15.2
NC16: J35.3 K16.2
NO1: J5.1 K1.3
NO2: J6.1 K2.3
NO3: J7.1 K3.3
NO4: J8.1 K4.3
NO5: J13.1 K5.3
NO6: J15.1 K6.3
NO7: J16.1 K7.3
NO8: J17.1 K8.3
NO9: J22.1 K9.3
NO10: J24.1 K10.3
NO11: J25.1 K11.3
NO12: J26.1 K12.3
NO13: J31.1 K13.3
NO14: J33.1 K14.3
NO15: J34.1 K15.3
NO16: J35.1 K16.3
OPTO_1: Q4.1 U3.5
OPTO_2: Q3.1 U3.7
OPTO_3: Q2.1 U2.5
OPTO_4: Q1.1 U2.7
OPTO_5: Q5.1 U4.5
OPTO_6: Q8.1 U4.7
OPTO_7: Q7.1 U6.5
OPTO_8: Q6.1 U6.7
OPTO_9: Q9.1 U9.5
OPTO_10: Q12.1 U9.7
OPTO_11: Q11.1 U10.5
OPTO_12: Q10.1 U10.7
OPTO_13: Q13.1 U13.5
OPTO_14: Q16.1 U13.7
OPTO_15: Q15.1 U14.5
OPTO_16: Q14.1 U14.7
RELAY_CTRL1: R2.2 U5.10
RELAY_CTRL2: R3.2 U5.11
RELAY_CTRL3: R10.2 U5.12
RELAY_CTRL4: R11.2 U5.13
RELAY_CTRL5: R23.2 U7.10
RELAY_CTRL6: R24.2 U7.11
RELAY_CTRL7: R25.2 U7.12
RELAY_CTRL8: R26.2 U7.13
RELAY_CTRL9: R40.2 U11.10
RELAY_CTRL10: R41.2 U11.11
RELAY_CTRL11: R42.2 U11.12
RELAY_CTRL12: R43.2 U11.13
RELAY_CTRL13: R57.2 U15.10
RELAY_CTRL14: R58.2 U15.11
RELAY_CTRL15: R59.2 U15.12
RELAY_CTRL16: R60.2 U15.13
SCL/SCK: J1.1 J2.4 J3.4 J4.3 U5.9
SCL/SCK1: J10.4 J11.4 J12.3 J14.1 U7.9
SCL/SCK2: J19.4 J20.4 J21.3 J23.1 U11.9
SCL/SCK3: J28.4 J29.4 J30.3 J32.1 U15.9
SDA/MOSI: J1.2 J2.3 J3.3 J4.4 U5.7
SDA/MOSI1: J10.3 J11.3 J12.4 J14.2 U7.7
SDA/MOSI2: J19.3 J20.3 J21.4 J23.2 U11.7
SDA/MOSI3: J28.3 J29.3 J30.4 J32.2 U15.7
VIN: D11.A J9.PWR JP7.1
VIN1: D20.A J18.PWR JP19.1
VIN2: D30.A J27.PWR JP29.1
VIN3: D40.A J36.PWR JP39.1